# EAGLE board CT_schematic (EAGLE 7.6.0)

Size 100 x 80 mm. Coordinates in mm from the lower left corner, seen from the top.
Outline: 0,0 100,0 100,80 0,80 0,0
Copper layers (1*16): Top 0.035mm / dielectric 1.5mm / Bottom 0.035mm
Design rules "default": minimum track width 10mil, minimum drill 24mil, track to track 8mil, track to pad 8mil, pad to pad 8mil, via to via 8mil, smd to smd 8mil, copper to edge 40mil, drill to drill 8mil, minimum pad ring 10mil, minimum via ring 8mil, stop-mask expansion 4mil, vias tented up to drill 0mil, thermal gap 10mil

## Footprints (pad centres in the part's own frame; a part is rotated, then mirrored left to right if it is on the bottom)
C0603 = smd 0.8 x 0.8: 1 -0.762,0; 2 0.762,0
C0402 = smd 0.5 x 0.5: 1 -0.508,0; 2 0.508,0
C0805 = smd 1.2 x 1.3: 1 -1.016,0; 2 1.016,0
C1210 = smd 1.2 x 2.5: 1 -1.524,0; 2 1.524,0
C1206 = smd 1.3 x 1.6: 1 -1.524,0; 2 1.524,0
EXV-9H = smd 3.505 x 1.676: 1 -2.857,0; 2 2.857,0
L0603 = smd 0.8 x 0.8: 1 -0.762,0; 2 0.762,0
DR1040 = smd 1.6 x 3.2: 1 -4.458,0; 2 4.458,0
PJ-037B_PACKAGE = drill 3.7 square: 1 12,0 | drill 3.2 square: 2 6,0
R0603 = smd 0.8 x 0.8: 1 -0.762,0; 2 0.762,0
TFBGA216 = smd 0.4 x 0.4: A1 -5.6,5.6; A2 -4.8,5.6; A3 -4,5.6; A4 -3.2,5.6; A5 -2.4,5.6; A6 -1.6,5.6; A7 -0.8,5.6; A8 0,5.6; A9 0.8,5.6; A10 1.6,5.6; A11 2.4,5.6; A12 3.2,5.6; A13 4,5.6; A14 4.8,5.6; A15 5.6,5.6; B1 -5.6,4.8; B2 -4.8,4.8; B3 -4,4.8; B4 -3.2,4.8; B5 -2.4,4.8; B6 -1.6,4.8; B7 -0.8,4.8; B8 0,4.8; B9 0.8,4.8; B10 1.6,4.8; B11 2.4,4.8; B12 3.2,4.8; B13 4,4.8; B14 4.8,4.8; B15 5.6,4.8; C1 -5.6,4; C2 -4.8,4; C3 -4,4; C4 -3.2,4; C5 -2.4,4; C6 -1.6,4; C7 -0.8,4; C8 0,4; C9 0.8,4; C10 1.6,4; C11 2.4,4; C12 3.2,4; C13 4,4; C14 4.8,4; C15 5.6,4; D1 -5.6,3.2; D2 -4.8,3.2; D3 -4,3.2; D4 -3.2,3.2; D5 -2.4,3.2; D6 -1.6,3.2; D7 -0.8,3.2; D8 0,3.2; D9 0.8,3.2; D10 1.6,3.2; D11 2.4,3.2; D12 3.2,3.2; D13 4,3.2; D14 4.8,3.2; D15 5.6,3.2; E1 -5.6,2.4; E2 -4.8,2.4; E3 -4,2.4; E4 -3.2,2.4; E5 -2.4,2.4; E6 -1.6,2.4; E7 -0.8,2.4; E8 0,2.4; E9 0.8,2.4; E10 1.6,2.4; E11 2.4,2.4; E12 3.2,2.4; E13 4,2.4; E14 4.8,2.4; E15 5.6,2.4; F1 -5.6,1.6; F2 -4.8,1.6; F3 -4,1.6; F4 -3.2,1.6; F5 -2.4,1.6; F6 -1.6,1.6; F7 -0.8,1.6; F8 0,1.6; F9 0.8,1.6; F10 1.6,1.6; F11 2.4,1.6; F12 3.2,1.6; F13 4,1.6; F14 4.8,1.6; F15 5.6,1.6; G1 -5.6,0.8; G2 -4.8,0.8; G3 -4,0.8; G4 -3.2,0.8; G5 -2.4,0.8; G6 -1.6,0.8; G10 1.6,0.8; G11 2.4,0.8; G12 3.2,0.8; G13 4,0.8; G14 4.8,0.8; G15 5.6,0.8; H1 -5.6,0; H2 -4.8,0; H3 -4,0; H4 -3.2,0; H5 -2.4,0; H6 -1.6,0; H10 1.6,0; H11 2.4,0; H12 3.2,0; H13 4,0; H14 4.8,0; H15 5.6,0; J1 -5.6,-0.8; J2 -4.8,-0.8; J3 -4,-0.8; J4 -3.2,-0.8; J5 -2.4,-0.8; J6 -1.6,-0.8; J10 1.6,-0.8; J11 2.4,-0.8; J12 3.2,-0.8; J13 4,-0.8; J14 4.8,-0.8; J15 5.6,-0.8; K1 -5.6,-1.6; K2 -4.8,-1.6; K3 -4,-1.6; K4 -3.2,-1.6; K5 -2.4,-1.6; K6 -1.6,-1.6; K7 -0.8,-1.6; K8 0,-1.6; K9 0.8,-1.6; K10 1.6,-1.6; K11 2.4,-1.6; K12 3.2,-1.6; K13 4,-1.6; K14 4.8,-1.6; K15 5.6,-1.6; L1 -5.6,-2.4; L2 -4.8,-2.4; L3 -4,-2.4; L4 -3.2,-2.4; L5 -2.4,-2.4; L6 -1.6,-2.4; L7 -0.8,-2.4; L8 0,-2.4; L9 0.8,-2.4; L10 1.6,-2.4; L11 2.4,-2.4; L12 3.2,-2.4; L13 4,-2.4; L14 4.8,-2.4; L15 5.6,-2.4; M1 -5.6,-3.2; M2 -4.8,-3.2; M3 -4,-3.2; M4 -3.2,-3.2; M5 -2.4,-3.2; M6 -1.6,-3.2; M7 -0.8,-3.2; M8 0,-3.2; M9 0.8,-3.2; M10 1.6,-3.2; M11 2.4,-3.2; M12 3.2,-3.2; M13 4,-3.2; M14 4.8,-3.2; M15 5.6,-3.2; N1 -5.6,-4; N2 -4.8,-4; N3 -4,-4; N4 -3.2,-4; N5 -2.4,-4; N6 -1.6,-4; N7 -0.8,-4; N8 0,-4; N9 0.8,-4; N10 1.6,-4; N11 2.4,-4; N12 3.2,-4; N13 4,-4; N14 4.8,-4; N15 5.6,-4; P1 -5.6,-4.8; P2 -4.8,-4.8; P3 -4,-4.8; P4 -3.2,-4.8; P5 -2.4,-4.8; P6 -1.6,-4.8; P7 -0.8,-4.8; P8 0,-4.8; P9 0.8,-4.8; P10 1.6,-4.8; P11 2.4,-4.8; P12 3.2,-4.8; P13 4,-4.8; P14 4.8,-4.8; P15 5.6,-4.8; R1 -5.6,-5.6; R2 -4.8,-5.6; R3 -4,-5.6; R4 -3.2,-5.6; R5 -2.4,-5.6; R6 -1.6,-5.6; R7 -0.8,-5.6; R8 0,-5.6; R9 0.8,-5.6; R10 1.6,-5.6; R11 2.4,-5.6; R12 3.2,-5.6; R13 4,-5.6; R14 4.8,-5.6; R15 5.6,-5.6
ARDUCAM = drill 1 pad 1.8 square: 1 0,0 | drill 1 pad 1.8: 2 0,2.54; 3 2.54,0; 4 2.54,2.54; 5 5.08,0; 6 5.08,2.54; 7 7.62,0; 8 7.62,2.54; 9 10.16,0; 10 10.16,2.54; 11 12.7,0; 12 12.7,2.54; 13 15.24,0; 14 15.24,2.54; 15 17.78,0; 16 17.78,2.54; 17 20.32,0; 18 20.32,2.54; 19 22.86,0; 20 22.86,2.54
SSOP-28 = smd 1.5 x 0.4: 1 -3.625,4.225; 2 -3.625,3.575; 3 -3.625,2.925; 4 -3.625,2.275; 5 -3.625,1.625; 6 -3.625,0.975; 7 -3.625,0.325; 8 -3.625,-0.325; 9 -3.625,-0.975; 10 -3.625,-1.625; 11 -3.625,-2.275; 12 -3.625,-2.925; 13 -3.625,-3.575; 14 -3.625,-4.225; 15 3.625,-4.225; 16 3.625,-3.575; 17 3.625,-2.925; 18 3.625,-2.275; 19 3.625,-1.625; 20 3.625,-0.975; 21 3.625,-0.325; 22 3.625,0.325; 23 3.625,0.975; 24 3.625,1.625; 25 3.625,2.275; 26 3.625,2.925; 27 3.625,3.575; 28 3.625,4.225
FCI_10118193-0001LF = smd 0.4 x 1.35: 1 -1.3,2.675; 2 -0.65,2.675; 3 0,2.675; 4 0.65,2.675; 5 1.3,2.675 | smd 1.6 x 1.4: 6 -3.2,2.45; 7 3.2,2.45 | smd 1.9 x 1.9: 8 -1.2,0; 9 1.2,0 | hole 0.5: -3.3,0; 3.3,0
SOT143B = smd 1 x 0.7: 1 -0.75,-1 | smd 0.6 x 0.7: 2 0.95,-1; 3 0.95,1; 4 -0.95,1
QFN-28 = smd 0.813 x 0.305: 1 -2.451,1.5; 2 -2.451,1; 3 -2.451,0.5; 4 -2.451,0; 5 -2.451,-0.5; 6 -2.451,-1; 7 -2.451,-1.5; 15 2.451,-1.5; 16 2.451,-1; 17 2.451,-0.5; 18 2.451,0; 19 2.451,0.5; 20 2.451,1; 21 2.451,1.5 | smd 0.305 x 0.813: 8 -1.5,-2.451; 9 -1,-2.451; 10 -0.5,-2.451; 11 0,-2.451; 12 0.5,-2.451; 13 1,-2.451; 14 1.5,-2.451; 22 1.5,2.451; 23 1,2.451; 24 0.5,2.451; 25 0,2.451; 26 -0.5,2.451; 27 -1,2.451; 28 -1.5,2.451 | smd 3.607 x 3.607: 29 0,0
SJ-43515TS-SMT-TR = smd 2.2 x 3: 1 0.6,-7.4; 4 3.4,-7.4 | smd 3 x 3: 2 12.8,-7.4; 5 17,-3 | smd 2 x 3: 3 5.3,0; 6 2.5,0 | drill 1.8: P$7 4.5,-3.69; P$8 11.54,-3.69
ABLS-25.000MHZ-B2F-T = smd 5.6 x 2.8: 1 -3.81,0; 2 5.69,0
ABLS-12.000MHZ-B4-T = smd 5.6 x 2.8: 1 0,0; 2 9.5,0
ASEK = smd 1.4 x 1: 1 -1.1,-0.8; 2 1.1,-0.8; 3 1.1,0.8; 4 -1.1,0.8
ASFL1 = smd 1.7 x 1.5: 1 -1.27,-1.1; 2 1.27,-1.1; 3 1.27,1.1; 4 -1.27,1.1
IDT74FCT38072 = smd 0.51 x 1: 1 0,0; 2 1.27,0; 3 2.54,0; 4 3.81,0; 5 3.81,4.95; 6 2.54,4.95; 7 1.27,4.95; 8 0,4.95
HTSSOP14 = smd 1.676 x 0.356: 1 -2.8,1.95; 2 -2.8,1.3; 3 -2.8,0.65; 4 -2.8,0; 5 -2.8,-0.65; 6 -2.8,-1.3; 7 -2.8,-1.95; 8 2.8,-1.95; 9 2.8,-1.3; 10 2.8,-0.65; 11 2.8,0; 12 2.8,0.65; 13 2.8,1.3; 14 2.8,1.95 | smd 3 x 5: 15 0,0 | drill 0.4 pad 0.45: P$1 -0.75,1.5; P$2 0.75,1.5; P$3 -0.75,0; P$4 0.8,0; P$5 -0.75,-1.5; P$6 0.9,-1.5
SON-6 = smd 0.55 x 0.3: 1 -0.355,0.5 | smd 0.52 x 0.3: 2 -0.37,0; 3 -0.37,-0.5; 4 0.37,-0.5; 5 0.37,0; 6 0.37,0.5
SW_4-1437565-2 = smd 1.4 x 2.1: 1 -2.23,4.55; 2 -2.23,-4.55; 3 2.23,4.55; 4 2.23,-4.55
LGM67K-G1J2-24-Z = smd 0.8 x 1.4: A -2,0; C 0,0
NC7SZ125M5X = smd 1.3 x 0.7: 1 -1.3,0.95; 2 -1.3,0; 3 -1.3,-0.95; 4 1.3,-0.95; 5 1.3,0.95

## Placement (x,y rotation side)
C1  1e-06  [C0603]  -60.96,86.36 0 top  (outside the outline)
C2  1e-07  [C0603]  -64.77,86.36 0 top  (outside the outline)
C3  1e-07  [C0603]  -68.58,86.36 0 top  (outside the outline)
C4  1e-07  [C0603]  -72.39,86.36 0 top  (outside the outline)
C5  1e-07  [C0603]  -76.2,86.36 0 top  (outside the outline)
C6  1e-07  [C0603]  -80.01,86.36 0 top  (outside the outline)
C7  1e-07  [C0603]  -83.82,86.36 0 top  (outside the outline)
C8  1e-07  [C0603]  -87.63,86.36 0 top  (outside the outline)
C9  1e-07  [C0603]  -91.44,86.36 0 top  (outside the outline)
C10  1e-07  [C0603]  -15.24,91.44 0 top  (outside the outline)
C11  1e-07  [C0603]  -19.05,91.44 0 top  (outside the outline)
C12  1e-07  [C0603]  -22.86,91.44 0 top  (outside the outline)
C13  1e-07  [C0603]  -26.67,91.44 0 top  (outside the outline)
C14  1e-07  [C0603]  -30.48,91.44 0 top  (outside the outline)
C15  1e-07  [C0603]  -34.29,91.44 0 top  (outside the outline)
C16  1e-07  [C0603]  -38.1,91.44 0 top  (outside the outline)
C17  1e-07  [C0603]  -41.91,91.44 0 top  (outside the outline)
C18  1e-07  [C0603]  -45.72,91.44 0 top  (outside the outline)
C19  1e-07  [C0603]  -49.53,91.44 0 top  (outside the outline)
C20  1e-07  [C0603]  -53.34,91.44 0 top  (outside the outline)
C21  1e-07  [C0603]  -57.15,91.44 0 top  (outside the outline)
C22  4.7e-06  [C0603]  -49.53,86.36 0 top  (outside the outline)
C23  1e-07  [C0603]  -60.96,91.44 0 top  (outside the outline)
C24  1e-08  [C0603]  -64.77,91.44 0 top  (outside the outline)
C25  1e-06  [C0603]  -68.58,91.44 0 top  (outside the outline)
C26  1e-07  [C0603]  -72.39,91.44 0 top  (outside the outline)
C27  2.2e-06  [C0603]  -53.34,86.36 0 top  (outside the outline)
C28  2.2e-06  [C0603]  -57.15,86.36 0 top  (outside the outline)
C29  1e-11  [C0402]  -39.37,96.52 0 top  (outside the outline)
C30  1e-11  [C0402]  -43.18,96.52 0 top  (outside the outline)
C32  1e-06  [C0603]  -76.2,91.44 0 top  (outside the outline)
C33  1e-07  [C0402]  -46.99,96.52 0 top  (outside the outline)
C34  4.7e-06  [C0805]  -66.04,73.66 0 top  (outside the outline)
C35  1e-07  [C0402]  -50.8,96.52 0 top  (outside the outline)
C36  1e-07  [C0402]  -54.61,96.52 0 top  (outside the outline)
C37  2.2e-05  [C1210]  -86.36,67.31 0 top  (outside the outline)
C38  2.2e-05  [C1210]  -92.71,67.31 0 top  (outside the outline)
C39  1e-09  [C0402]  -58.42,96.52 0 top  (outside the outline)
C40  1e-09  [C0402]  -62.23,96.52 0 top  (outside the outline)
C41  1e-07  [C0402]  -66.04,96.52 0 top  (outside the outline)
C42  1e-07  [C0402]  -69.85,96.52 0 top  (outside the outline)
C43  1e-07  [C0402]  -73.66,96.52 0 top  (outside the outline)
C44  1e-07  [C0402]  -77.47,96.52 0 top  (outside the outline)
C45  1e-07  [C0402]  -81.28,96.52 0 top  (outside the outline)
C46  1e-05  [C0805]  -71.12,73.66 0 top  (outside the outline)
C47  1e-05  [C0805]  -76.2,73.66 0 top  (outside the outline)
C48  1e-05  [C0805]  -81.28,73.66 0 top  (outside the outline)
C49  1e-05  [C0805]  -86.36,73.66 0 top  (outside the outline)
C50  1e-05  [C0805]  -91.44,73.66 0 top  (outside the outline)
C51  2.2e-05  [C1210]  -16.51,74.93 0 top  (outside the outline)
C52  2.2e-05  [C1210]  -22.86,74.93 0 top  (outside the outline)
C53  1e-09  [C0402]  -85.09,96.52 0 top  (outside the outline)
C54  1e-09  [C0402]  -88.9,96.52 0 top  (outside the outline)
C55  1e-07  [C0402]  -92.71,96.52 0 top  (outside the outline)
C56  1e-07  [C0402]  -15.24,101.6 0 top  (outside the outline)
C57  1e-07  [C0402]  -19.05,101.6 0 top  (outside the outline)
C58  1e-07  [C0402]  -22.86,101.6 0 top  (outside the outline)
C59  1e-07  [C0402]  -26.67,101.6 0 top  (outside the outline)
C60  1e-05  [C0805]  -15.24,81.28 0 top  (outside the outline)
C61  1e-05  [C0805]  -20.32,81.28 0 top  (outside the outline)
C62  1e-05  [C0805]  -25.4,81.28 0 top  (outside the outline)
C63  1e-05  [C0805]  -30.48,81.28 0 top  (outside the outline)
C64  1e-05  [C0805]  -35.56,81.28 0 top  (outside the outline)
C65  1e-08  [C0402]  -30.48,101.6 0 top  (outside the outline)
C66  1e-08  [C0402]  -34.29,101.6 0 top  (outside the outline)
C67  1e-08  [C0402]  -38.1,101.6 0 top  (outside the outline)
C68  1e-08  [C0402]  -41.91,101.6 0 top  (outside the outline)
C69  1e-06  [C0603]  -80.01,91.44 0 top  (outside the outline)
C70  3.3e-09  [C0402]  -35.56,96.52 0 top  (outside the outline)
C71  1e-07  [C0402]  -45.72,101.6 0 top  (outside the outline)
C72  2.2e-05  [C1210]  -29.21,74.93 0 top  (outside the outline)
C73  2.2e-05  [C1210]  -35.56,74.93 0 top  (outside the outline)
C74  1e-05  [C1206]  -41.91,74.93 0 top  (outside the outline)
C75  1e-05  [C1206]  -48.26,74.93 0 top  (outside the outline)
C76  1e-07  [C0402]  -49.53,101.6 0 top  (outside the outline)
C77  0.0001  [EXV-9H]  -38.1,59.69 0 top  (outside the outline)
C78  0.0001  [EXV-9H]  -49.53,59.69 0 top  (outside the outline)
C79  1e-08  [C0402]  -53.34,101.6 0 top  (outside the outline)
C80  1e-08  [C0402]  -57.15,101.6 0 top  (outside the outline)
F1  240.0  [L0603]  -83.82,91.44 0 top  (outside the outline)
I1  7e-06  [DR1040]  -82.55,36.83 0 top  (outside the outline)
J1  PJ-037B  [PJ-037B_PACKAGE]  -55.88,38.1 0 top  (outside the outline)
R2  1000.0  [R0603]  -87.63,91.44 0 top  (outside the outline)
R7  4700.0  [R0603]  -91.44,91.44 0 top  (outside the outline)
R8  4700.0  [R0603]  -15.24,96.52 0 top  (outside the outline)
R9  10000.0  [R0603]  -59.69,80.01 0 top  (outside the outline)
R10  10000.0  [R0603]  -64.77,80.01 0 top  (outside the outline)
R11  10000.0  [R0603]  -69.85,80.01 0 top  (outside the outline)
R12  4700.0  [R0603]  -19.05,96.52 0 top  (outside the outline)
R13  10000.0  [R0603]  -74.93,80.01 0 top  (outside the outline)
R14  10000.0  [R0603]  -80.01,80.01 0 top  (outside the outline)
R15  47000.0  [R0603]  -85.09,80.01 0 top  (outside the outline)
R16  47000.0  [R0603]  -90.17,80.01 0 top  (outside the outline)
R17  47000.0  [R0603]  -15.24,86.36 0 top  (outside the outline)
R18  680.0  [R0603]  -22.86,96.52 0 top  (outside the outline)
R19  47000.0  [R0603]  -20.32,86.36 0 top  (outside the outline)
R20  47000.0  [R0603]  -25.4,86.36 0 top  (outside the outline)
R21  47000.0  [R0603]  -30.48,86.36 0 top  (outside the outline)
R22  680.0  [R0603]  -26.67,96.52 0 top  (outside the outline)
R23  71007.101651032  [R0603]  -44.45,80.01 0 top  (outside the outline)
R24  22000.0  [R0603]  -35.56,86.36 0 top  (outside the outline)
R25  10000.0  [R0603]  -40.64,86.36 0 top  (outside the outline)
R26  10000.0  [R0603]  -45.72,86.36 0 top  (outside the outline)
R27  9100.0  [R0603]  -30.48,96.52 0 top  (outside the outline)
R28  680000.0  [R0603]  -49.53,80.01 0 top  (outside the outline)
R29  120000.0  [R0603]  -54.61,80.01 0 top  (outside the outline)
U1  STM32F767NIH6  [TFBGA216]  -24.13,8.89 0 top  (outside the outline)
U2  arducam_ov2640  [ARDUCAM]  -40.64,64.77 0 top  (outside the outline)
U3  FT232RL-REEL  [SSOP-28]  -38.1,7.62 0 top  (outside the outline)
U4  10118193-0001LF  [FCI_10118193-0001LF]  -55.88,49.53 0 top  (outside the outline)
U5  10118193-0001LF  [FCI_10118193-0001LF]  -66.04,49.53 0 top  (outside the outline)
U6  prtr5v0u2ax  [SOT143B]  -69.85,101.6 0 top  (outside the outline)
U7  WM8731CLSEFL  [QFN-28]  -69.85,67.31 0 top  (outside the outline)
U8  SJ-43515TS-SMT-TR  [SJ-43515TS-SMT-TR]  -69.85,10.16 0 top  (outside the outline)
U9  SJ-43515TS-SMT-TR  [SJ-43515TS-SMT-TR]  -39.37,26.67 0 top  (outside the outline)
U10  WM8731CLSEFL  [QFN-28]  -78.74,67.31 0 top  (outside the outline)
U11  SJ-43515TS-SMT-TR  [SJ-43515TS-SMT-TR]  -67.31,26.67 0 top  (outside the outline)
U12  SJ-43515TS-SMT-TR  [SJ-43515TS-SMT-TR]  -39.37,40.64 0 top  (outside the outline)
U13  ABLS-25.000MHZ-B2F-T  [ABLS-25.000MHZ-B2F-T]  -68.58,59.69 0 top  (outside the outline)
U14  ABLS-12.000MHZ-B4-T  [ABLS-12.000MHZ-B4-T]  -92.71,59.69 0 top  (outside the outline)
U15  ASEK-32.768KHz-ECST  [ASEK]  -29.21,59.69 0 top  (outside the outline)
U16  ASFL1-12.288MHZ-EC-T  [ASFL1]  -30.48,50.8 0 top  (outside the outline)
U17  idt74fct38072  [IDT74FCT38072]  -87.63,46.99 0 top  (outside the outline)
U18  ASFL1-25MHZ-NCS  [ASFL1]  -46.99,50.8 0 top  (outside the outline)
U19  tps54325PWP  [HTSSOP14]  -48.26,67.31 0 top  (outside the outline)
U20  TPS3895ADRYR  [SON-6]  -73.66,100.33 0 top  (outside the outline)
U21  4-1437565-2  [SW_4-1437565-2]  -72.39,38.1 0 top  (outside the outline)
U22  Q65110A2395  [LGM67K-G1J2-24-Z]  -57.15,67.31 0 top  (outside the outline)
U23  nc7sz125m5x  [NC7SZ125M5X]  -53.34,73.66 0 top  (outside the outline)
U24  nc7sz125m5x  [NC7SZ125M5X]  -59.69,73.66 0 top  (outside the outline)

## Library data of the parts
C1-C30 C32-C80 F1 I1 J1 R2 R7-R29 U1-U24 = circuit_tree

## Nets
CLK_CRYSTAL_U1_G1: C29.1 U1.G1 U13.1
CLK_CRYSTAL_U1_H1: C30.1 U1.H1 U13.2
CLK_CRYSTAL_U3_27: U3.27 U14.1
CLK_CRYSTAL_U3_28: U3.28 U14.2
CLK_U1_E1: U1.E1 U15.3
CLK_U2_8: U2.8 U18.3
CLK_U7_1: U7.1 U17.7
CLK_U10_1: U10.1 U17.6
CLK_U17_3: U16.3 U17.3
GND: C1.2 C2.2 C3.2 C4.2 C5.2 C6.2 C7.2 C8.2 C9.2 C10.2 C11.2 C12.2 C13.2 C14.2 C15.2 C16.2 C17.2 C18.2 C19.2 C20.2 C21.2 C22.2 C23.2 C24.2 C25.2 C26.2 C27.2 C28.2 C29.2 C30.2 C32.2 C33.2 C34.2 C35.2 C36.2 C40.2 C41.2 C42.2 C43.2 C44.2 C45.2 C46.2 C47.2 C48.2 C49.2 C50.2 C54.2 C55.2 C56.2 C57.2 C58.2 C59.2 C60.2 C61.2 C62.2 C63.2 C64.2 C65.2 C66.2 C67.2 C68.2 C69.2 C70.2 C72.2 C73.2 C74.2 C75.2 C76.2 C77.2 C78.2 C79.2 C80.2 J1.2 R2.2 R9.2 R11.2 R14.2 R15.2 R16.2 R17.2 R19.2 R20.2 R21.2 R24.2 R27.2 R29.2 U1.F2 U1.F6 U1.F7 U1.F8 U1.F9 U1.F10 U1.G6 U1.G10 U1.H6 U1.H10 U1.J6 U1.J10 U1.K6 U1.K7 U1.K8 U1.K9 U1.K10 U1.L6 U1.M1 U1.N1 U2.2 U2.20 U3.7 U3.18 U3.21 U3.25 U3.26 U4.5 U4.6 U4.7 U4.8 U4.9 U5.5 U5.6 U5.7 U5.8 U5.9 U6.1 U7.4 U7.15 U7.19 U7.25 U7.26 U7.29 U8.1 U9.1 U10.4 U10.15 U10.19 U10.25 U10.26 U10.29 U11.1 U12.1 U15.2 U16.2 U17.4 U17.5 U17.8 U18.2 U19.5 U19.8 U19.9 U19.15 U20.2 U22.C U23.1 U23.3 U24.1 U24.3
NET_U1_E5: R10.1 U1.E5
NET_U1_E6: R9.1 U1.E6
NET_U1_E11: C28.1 U1.E11
NET_U1_J1: R7.1 U1.J1 U23.4
NET_U1_L5: R11.1 U1.L5
NET_U1_L11: C27.1 U1.L11
NET_U1_R1: C24.1 C25.1 F1.1 U1.P1 U1.R1
NET_U1_R14: U22.A
NET_U1_R15: U21.3 U21.4
NET_U2_19: R8.1 U2.19 U24.4
NET_U3_14: R13.1 U3.14
NET_U3_17: C35.1 U3.17
NET_U3_19: R14.1 U3.19
NET_U4_1: R12.1 U4.1
NET_U4_2: U3.16 U4.2
NET_U4_3: U3.15 U4.3
NET_U4_19: R12.2
NET_U7_9: U7.9
NET_U7_20: C45.1 C50.1 U7.20
NET_U8_2: C38.1 R16.1 U8.2
NET_U8_5: C37.1 R15.1 U8.5
NET_U8_13: C37.2
NET_U8_14: C38.2
NET_U9_5: C39.1 C40.1 R17.1 R18.1 U9.5
NET_U9_21: R18.2
NET_U9_22: C39.2
NET_U10_9: U10.9
NET_U10_20: C59.1 C64.1 U10.20
NET_U11_2: C52.1 R20.1 U11.2
NET_U11_5: C51.1 R19.1 U11.5
NET_U11_13: C51.2
NET_U11_14: C52.2
NET_U12_5: C53.1 C54.1 R21.1 R22.1 U12.5
NET_U12_21: R22.2
NET_U12_22: C53.2
NET_U19_2: R23.2 R24.1 U19.2
NET_U19_3: C69.1 U19.3
NET_U19_4: C70.1 U19.4
NET_U19_10: C71.1 I1.1 U19.10 U19.11
NET_U19_12: C71.2 U19.12
NET_U20_1: R26.1 R27.1 U20.1
NET_U20_3: R28.2 R29.1 U20.3
NET_U20_4: R25.1 U20.4 U23.2 U24.2
NET_U21_1: R2.1 U21.1 U21.2
PROC_DCMI_D0: U1.H15 U2.18
PROC_DCMI_D1: U1.D15 U2.17
PROC_DCMI_D2: U1.A6 U2.16
PROC_DCMI_D3: U1.A5 U2.15
PROC_DCMI_D4: U1.A1 U2.14
PROC_DCMI_D5: U1.B6 U2.13
PROC_DCMI_D6: U1.A7 U2.12
PROC_DCMI_D7: U1.B2 U2.11
PROC_DCMI_D8: U1.B14 U2.10
PROC_DCMI_D9: U1.A12 U2.9
PROC_DCMI_HSYNC: U1.N4 U2.6
PROC_DCMI_PIXCLK: U1.P3 U2.7
PROC_DCMI_VSYNC: U1.B5 U2.5
PROC_I2S1_CK: U1.A10 U7.7
PROC_I2S1_SD: U1.A8 U7.8
PROC_I2S1_WS: U1.C8 U7.9 U7.11
PROC_I2S2_CK: U1.C11 U10.7
PROC_I2S2_SD: U1.C13 U10.8
PROC_I2S2_WS: U1.A9 U10.9 U10.11
PROC_UART4_CTS: U1.R5 U3.3
PROC_UART4_RTS: U1.A13 U3.11
PROC_UART4_RX: U1.B12 U3.1
PROC_UART4_TX: U1.C12 U3.5
PROC_USB_OTG_FS_DM: U5.2 U6.3
PROC_USB_OTG_FS_DP: U5.3 U6.2
PROC_USB_OTG_FS_VBUS: U5.1 U6.4
VCC_S1_14V8: C74.1 C75.1 C77.1 C78.1 J1.1 U19.7 U19.13 U19.14
VCC_TIER1_3V3: C1.1 C2.1 C3.1 C4.1 C5.1 C6.1 C7.1 C8.1 C9.1 C10.1 C11.1 C12.1 C13.1 C14.1 C15.1 C16.1 C17.1 C18.1 C19.1 C20.1 C21.1 C22.1 C23.1 C26.1 C32.1 C33.1 C34.1 C36.1 C41.1 C42.1 C43.1 C44.1 C46.1 C47.1 C48.1 C49.1 C55.1 C56.1 C57.1 C58.1 C60.1 C61.1 C62.1 C63.1 C65.1 C66.1 C67.1 C68.1 C72.1 C73.1 C76.1 C79.1 C80.1 F1.2 I1.2 R7.2 R8.2 R10.2 R13.2 R23.1 R25.2 R26.2 R28.1 U1.C1 U1.E7 U1.E8 U1.E9 U1.E10 U1.F4 U1.F5 U1.F11 U1.G5 U1.G11 U1.H5 U1.H11 U1.J5 U1.J11 U1.K5 U1.K11 U1.L7 U1.L8 U1.L9 U1.L10 U2.1 U3.4 U3.20 U7.3 U7.5 U7.12 U7.18 U10.3 U10.5 U10.12 U10.18 U15.4 U16.4 U17.1 U17.2 U18.4 U19.1 U20.6 U23.5 U24.5

## Tracks (layer width: path | path; a pad name or v marks a point on that pad's centre or on a via)
CLK_CRYSTAL_U1_G1  (2 unrouted)
CLK_CRYSTAL_U1_H1  (2 unrouted)
CLK_CRYSTAL_U3_27  (1 unrouted)
CLK_CRYSTAL_U3_28  (1 unrouted)
CLK_U1_E1  (1 unrouted)
CLK_U2_8  (1 unrouted)
CLK_U7_1  (1 unrouted)
CLK_U10_1  (1 unrouted)
CLK_U17_3  (1 unrouted)
GND  (155 unrouted)
NET_U1_E5  (1 unrouted)
NET_U1_E6  (1 unrouted)
NET_U1_E11  (1 unrouted)
NET_U1_J1  (2 unrouted)
NET_U1_L5  (1 unrouted)
NET_U1_L11  (1 unrouted)
NET_U1_R1  (4 unrouted)
NET_U1_R15  (1 unrouted)
NET_U2_19  (2 unrouted)
NET_U3_14  (1 unrouted)
NET_U3_17  (1 unrouted)
NET_U3_19  (1 unrouted)
NET_U4_1  (1 unrouted)
NET_U4_2  (1 unrouted)
NET_U4_3  (1 unrouted)
NET_U7_20  (2 unrouted)
NET_U8_2  (2 unrouted)
NET_U8_5  (2 unrouted)
NET_U9_5  (4 unrouted)
NET_U10_20  (2 unrouted)
NET_U11_2  (2 unrouted)
NET_U11_5  (2 unrouted)
NET_U12_5  (4 unrouted)
NET_U19_2  (2 unrouted)
NET_U19_3  (1 unrouted)
NET_U19_4  (1 unrouted)
NET_U19_10  (3 unrouted)
NET_U19_12  (1 unrouted)
NET_U20_1  (2 unrouted)
NET_U20_3  (2 unrouted)
NET_U20_4  (3 unrouted)
NET_U21_1  (2 unrouted)
PROC_DCMI_D0  (1 unrouted)
PROC_DCMI_D1  (1 unrouted)
PROC_DCMI_D2  (1 unrouted)
PROC_DCMI_D3  (1 unrouted)
PROC_DCMI_D4  (1 unrouted)
PROC_DCMI_D5  (1 unrouted)
PROC_DCMI_D6  (1 unrouted)
PROC_DCMI_D7  (1 unrouted)
PROC_DCMI_D8  (1 unrouted)
PROC_DCMI_D9  (1 unrouted)
PROC_DCMI_HSYNC  (1 unrouted)
PROC_DCMI_PIXCLK  (1 unrouted)
PROC_DCMI_VSYNC  (1 unrouted)
PROC_I2S1_CK  (1 unrouted)
PROC_I2S1_SD  (1 unrouted)
PROC_I2S1_WS  (2 unrouted)
PROC_I2S2_CK  (1 unrouted)
PROC_I2S2_SD  (1 unrouted)
PROC_I2S2_WS  (2 unrouted)
PROC_UART4_CTS  (1 unrouted)
PROC_UART4_RTS  (1 unrouted)
PROC_UART4_RX  (1 unrouted)
PROC_UART4_TX  (1 unrouted)
PROC_USB_OTG_FS_DM  (1 unrouted)
PROC_USB_OTG_FS_DP  (1 unrouted)
PROC_USB_OTG_FS_VBUS  (1 unrouted)
VCC_S1_14V8  (7 unrouted)
VCC_TIER1_3V3  (102 unrouted)